# Altium PCB SolarArrayTop.PcbDoc
Units mm, origin at the board's own origin, x right, y up, seen from the top; angles counter-clockwise.
Board outline 94 x 94 mm, 2 copper layers (Top Layer, Bottom Layer), stack 1.567 mm thick; 23 components, 15 nets, 73 pads, 2 vias.
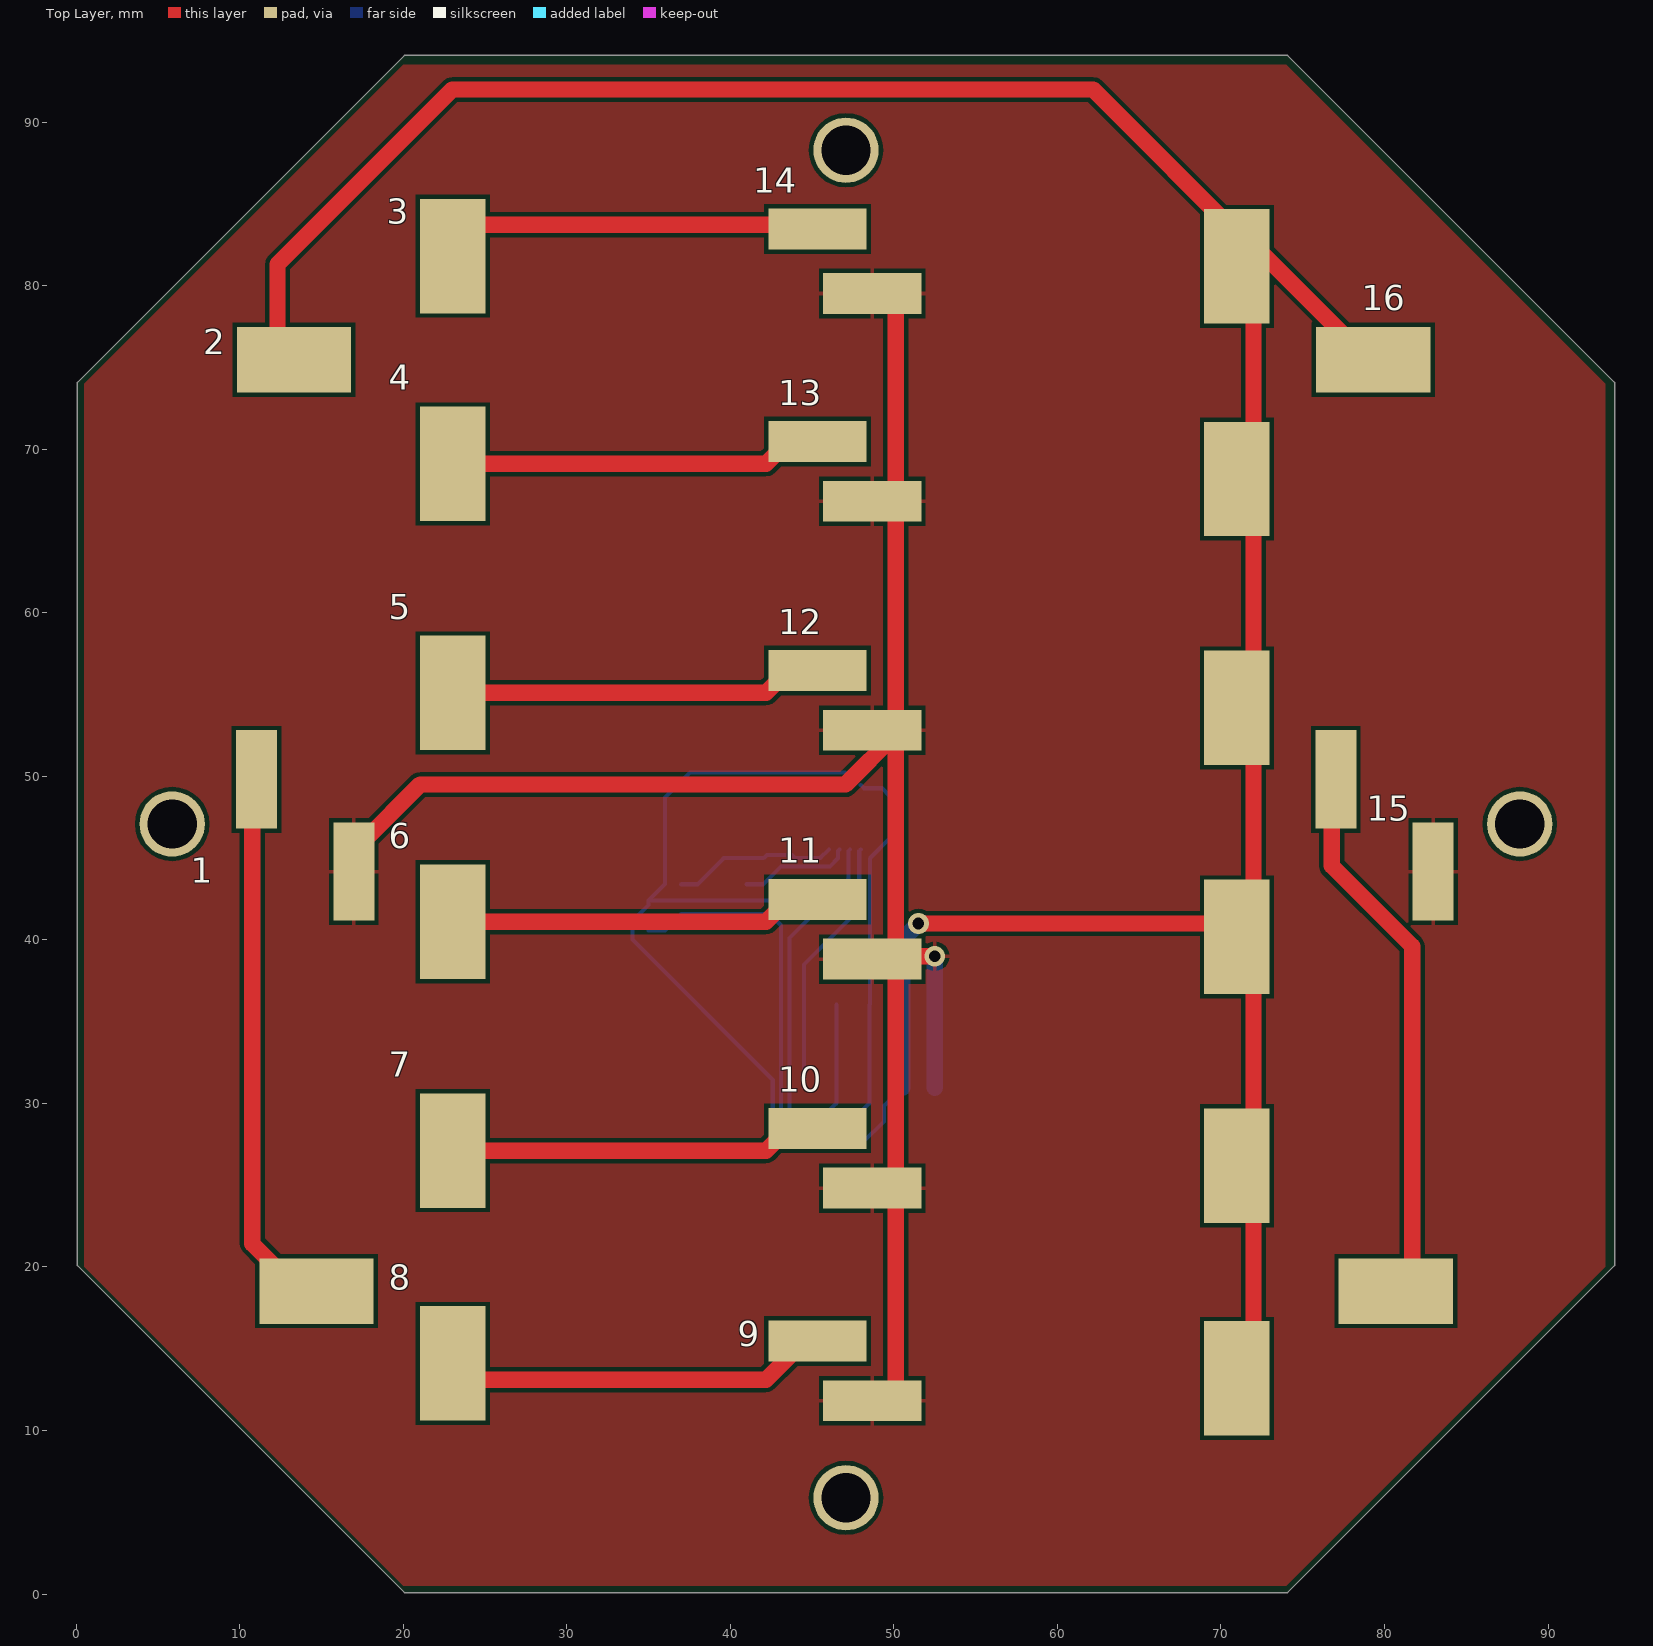
[diagram p0: Top Layer view]
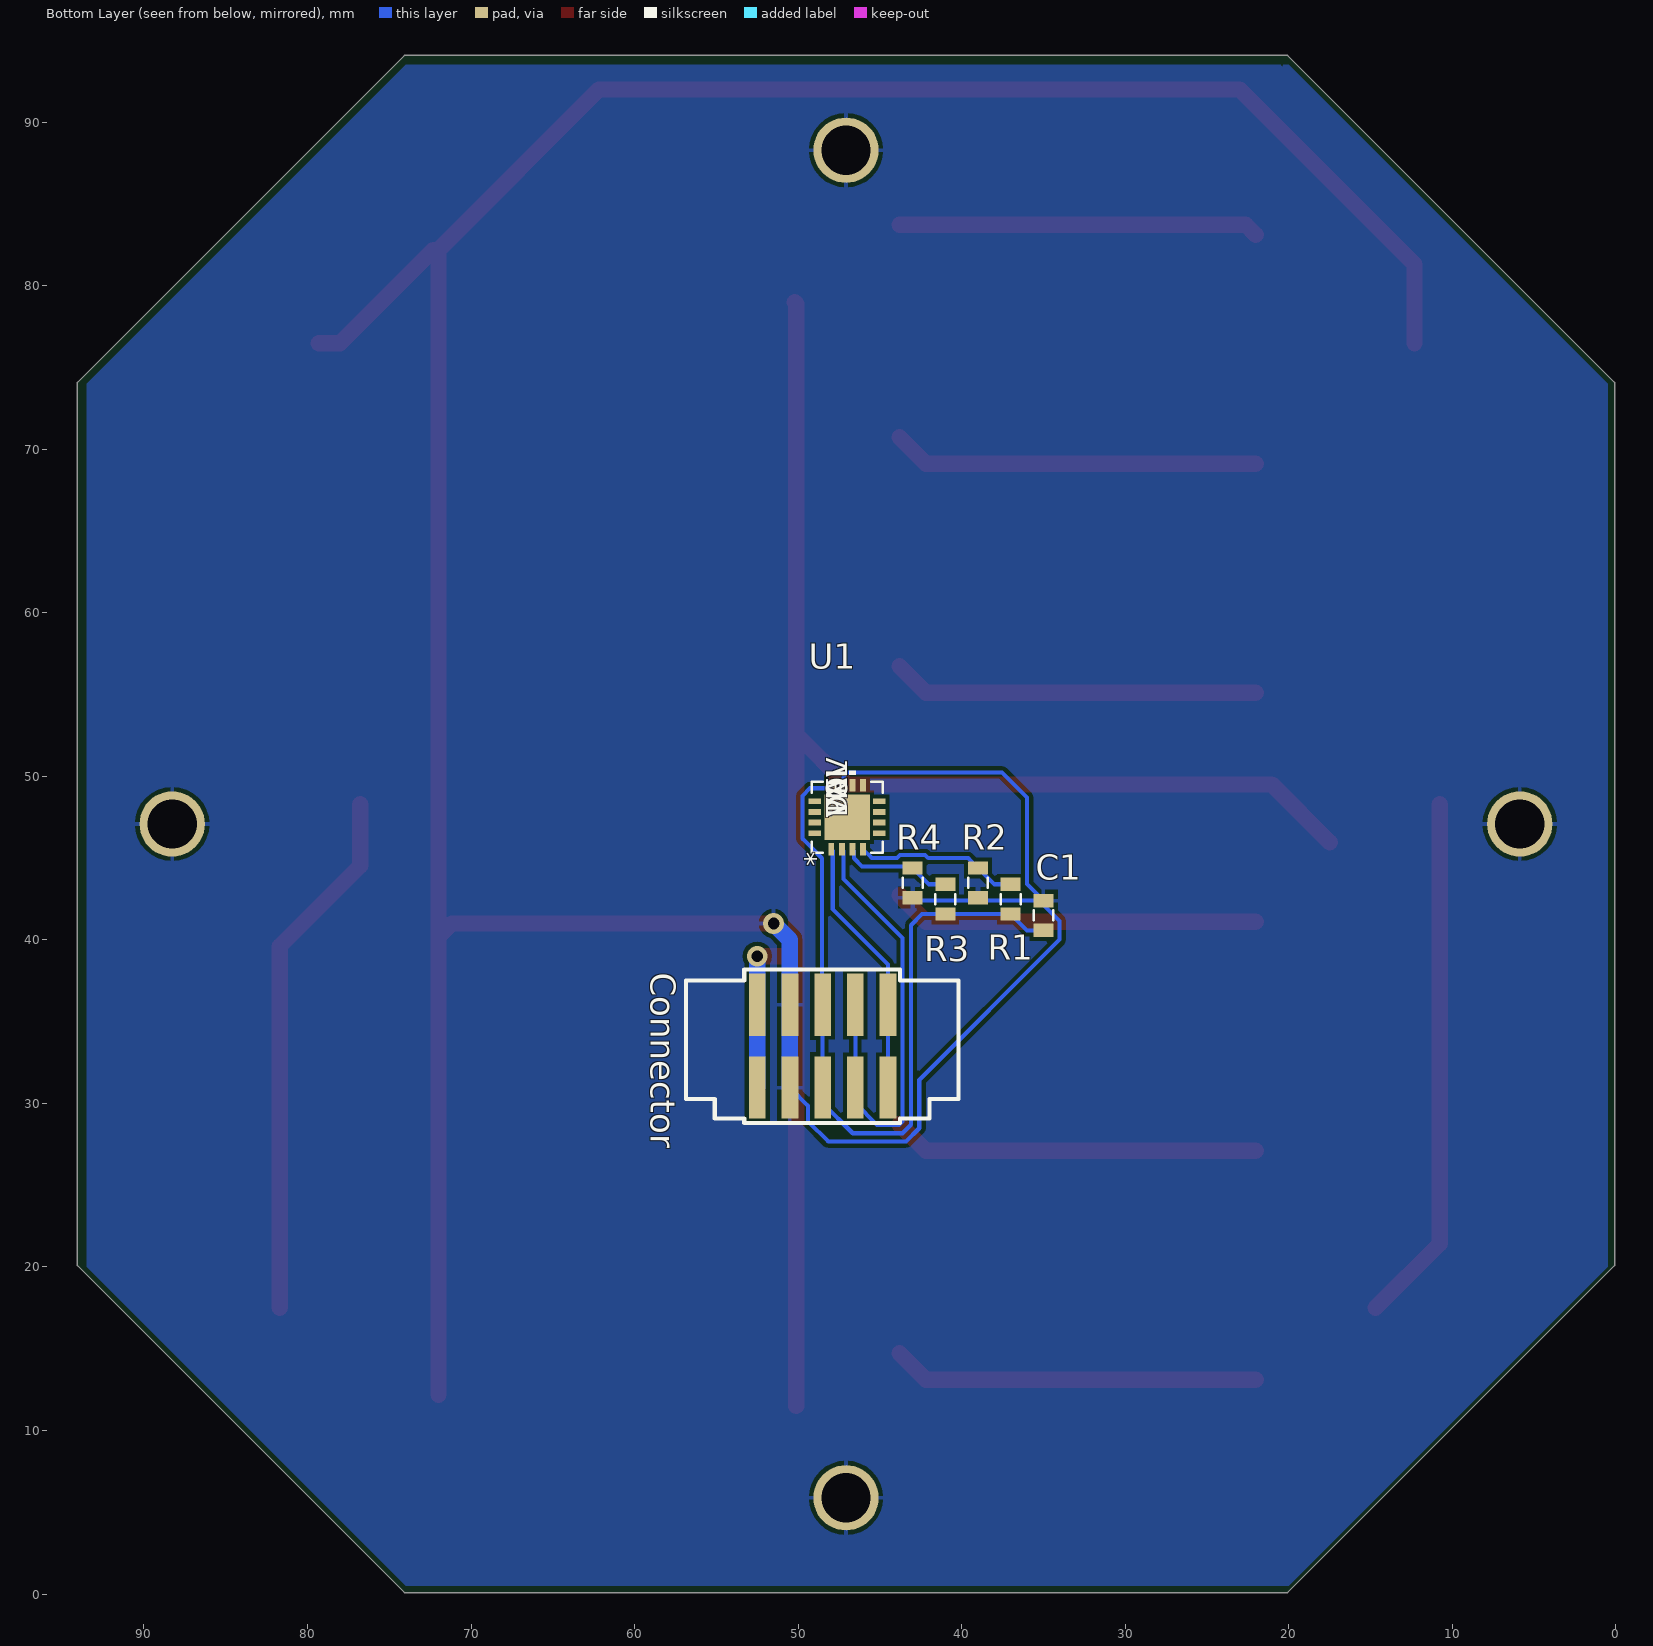
[diagram p1: Bottom Layer view, seen from below]
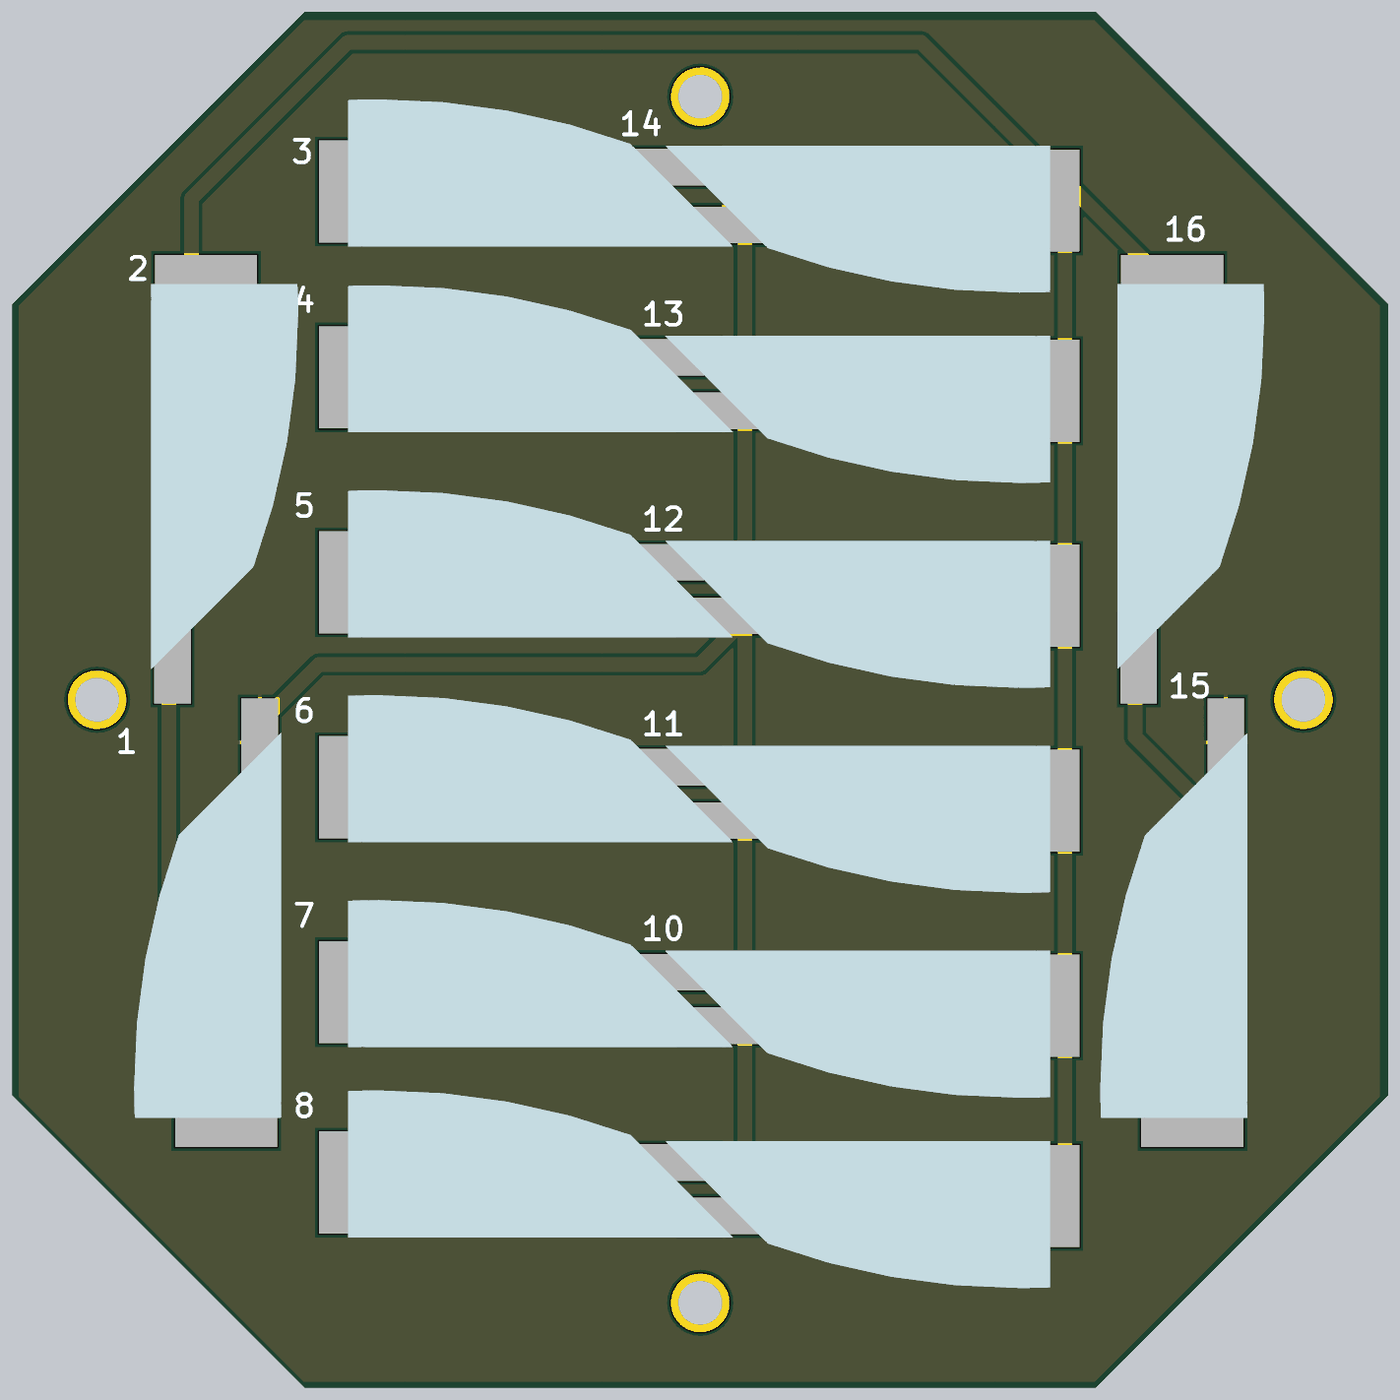
[diagram p2: 3D render of the assembled board from above, using the file's embedded part models]

## Layer stack, top to bottom
Top Solder: solder mask 0.0102, Solder Resist, Dk 3.5
Top Layer: signal copper 0.0356
Dielectric 1: dielectric 1.4961, FR-4, Dk 4.8
Bottom Layer: signal copper 0.0356
Bottom Solder: solder mask 0.0102, Solder Resist, Dk 3.5

## Board outline
20.071,94.088 0.071,74.088 0.071,20.088 20.071,0.088 74.071,0.088 94.071,20.088 94.071,74.088 74.071,94.088

## Design rules (kind name [scope] priority, off if disabled: settings)
Clearance [All] p1: gap=0.254
PolygonConnect [All] p1: connectstyle=Relief reliefconductorwidth=0.254 reliefentries=4 polygonreliefangle="90 Angle" airgapwidth=0.254
RoutingVias [All] p1: holewidth=0.711 width=1.27 viastyle="Through Hole" minholewidth=0.711 minwidth=1.27 maxholewidth=0.711 maxwidth=1.27
SolderMaskExpansion [All] p1: expansion=0.102
Width [All] p1: maxlimit=1 minlimit=0.254 preferedwidth=0.254 minimp=50.000000 maximp=50.000000 favimp=50.000000
29 further rules are at their usual default settings.

## Components (designator, comment, footprint, x,y, rotation, side; value= is the part's Value field where it differs from the comment)
1 "Trisol X Solar Wing" PCBComponent_1 18.5,17 r90 top
2 "Trisol X Solar Wing" PCBComponent_1 9.5,77 r270 top
3 "Trisol X Solar Wing" PCBComponent_1 21.5,78 r0 top
4 "Trisol X Solar Wing" PCBComponent_1 21.5,65.3 r0 top
5 "Trisol X Solar Wing" PCBComponent_1 21.5,51.3 r0 top
6 "Trisol X Solar Wing" PCBComponent_1 21.5,37.3 r0 top
7 "Trisol X Solar Wing" PCBComponent_1 21.5,23.3 r0 top
8 "Trisol X Solar Wing" PCBComponent_1 21.5,10.3 r0 top
9 "Trisol X Solar Wing" PCBComponent_1 72.5,17 r180 top
10 "Trisol X Solar Wing" PCBComponent_1 72.5,30 r180 top
11 "Trisol X Solar Wing" PCBComponent_1 72.5,44 r180 top
12 "Trisol X Solar Wing" PCBComponent_1 72.5,58 r180 top
13 "Trisol X Solar Wing" PCBComponent_1 72.5,72 r180 top
14 "Trisol X Solar Wing" PCBComponent_1 72.5,85 r180 top
15 "Trisol X Solar Wing" PCBComponent_1 84.5,17 r90 top
16 "Trisol X Solar Wing" PCBComponent_1 75.5,77 r270 top
C1 "100pF" 0805 35,41.5 r270 bottom
Connector "T2M-105-01-L-D-SM" T2M-105-01-X-D-SM 48.5,33.5 r180 bottom
R1 "1K" 0805 37,42.5 r270 bottom
R2 "1K" 0805 39,43.5 r270 bottom
R3 "1K" 0805 41,42.5 r270 bottom
R4 "1K" 0805 43,43.5 r270 bottom
U1 "ADT7420UCPZ-R2" CP_16_17 47,47.5 r90 bottom

## Footprints (in the part's own frame and the unit in brackets; to place one, negate y for a bottom-side part, rotate by r counter-clockwise, add the part's x,y. Pads: shape width x height; smd on the part's side, far side on the other; paste and mask are expansions set on the pad)
0805 [mil]
  rect 32x48 smd: 1(-35.43,0) 2(36,0)
  silkscreen extent -12,-24 12,24
CP_16_17 [mil]
  rect 30x14 smd: 1(-77.5,38.39) 2(-77.5,12.8) 3(-77.5,-12.8) 4(-77.5,-38.39) 9(77.5,-38.39) 10(77.5,-12.8) 11(77.5,12.8) 12(77.5,38.39)
  rect 14x30 smd: 5(-38.39,-77.5) 6(-12.8,-77.5) 7(12.8,-77.5) 8(38.39,-77.5) 13(38.39,77.5) 14(12.8,77.5) 15(-12.8,77.5) 16(-38.39,77.5)
  rect 110x110 smd paste-54.5: 17(0,0)
  silkscreen extent -86,-86 112,86, body extent 0,0 10,10, height 10
PCBComponent_1 [mm]
  rect 6x2.5 smd: 0(27.178,1.524)
  rect 4x6.985 smd: 1(1.524,3.81)
  body extent 1.52,0.06 27.82,10.1, height 0.24
T2M-105-01-X-D-SM [mm]
  rect 1.02x3.8 smd mask+0.05: 1(-4,-2.535) 2(-4,2.535) 3(-2,-2.535) 4(-2,2.535) 5(0,-2.535) 6(0,2.535) 7(2,-2.535) 8(2,2.535) 9(4,-2.535) 10(4,2.535)
  silkscreen extent -8.36,-4.69 8.31,4.69, body extent -7.84,-4.31 7.84,4.31, height 6.5

## Part data
C1: library part CAP0805_1nF
Connector: library part T2M-105-01-X-D-SM
R1 R2 R3 R4: library part RESISTOR0805-RES_1K
U1: "Imported"

## Free pads (board coordinates)
  round 4 hole 3: 1(5.871,47.088) 1(47.071,5.888) 1(47.071,88.288) 1(88.271,47.088)

## Via types
v1: diameter 1.27, hole 0.711, Top Layer to Bottom Layer, 2 vias

## Nets (pads, with @x,y where several pads share a name; then routed paths per layer and width w, separated by ;. In a path a pad name is that pad's centre, name@x,y a point inside that pad or via, vN(x,y) a via of type N, cw(c..) or ccw(c..) an arc to the next point about the centre after c; other vN are vias at no path point)
Net1_0: 1.0 3.0 4.0 5.0 6.0 7.0 8.0 15.0 Connector.1 Connector.2 | length 113.9
  Top Layer w0.254: 1.0@17.23,45.702 1.0@17.5,45.972
  Top Layer w1: 1.0@17.5,45.972 21.028,49.5 47.039,49.5 5.0@50.109,52.57 ; 8.0@50.109,11.5 6.0@50.109,38.57 ; 3.0@50.202,79 50.109,78.907 5.0@50.109,52.57 ; v1(52.5,39) 50.539,39 6.0@50.109,38.57 ; 6.0@50.109,38.57 5.0@50.109,52.57
  Bottom Layer w1: Connector.1 Connector.2 v1(52.5,39)
Net1_1: 1.1 2.0 | length 32.4
  Top Layer w1: 2.0@10.77,48.298 10.77,21.428 1.1@14.69,17.508
Net2_1: 2.1 9.1 10.1 11.1 12.1 13.1 14.1 16.1 C1.1 Connector.3 Connector.4 pad.1 R2.2 R4.2 U1.11 | length 239.3
  Top Layer w1: 2.1@12.31,76.492 12.31,81.31 23,92 62.182,92 14.1@71.992,82.19 ; v1(51.5,41) 71.182,41 11.1@71.992,40.19 ; 9.1@71.992,12.19 71.992,26.19 11.1@71.992,40.19 ; 16.1@79.31,76.492 78.008,76.492 72.31,82.19 14.1@71.992,82.19 ; 11.1@71.992,40.19 71.992,54.19 71.992,68.19 14.1@71.992,82.19
  Bottom Layer w0.254: R4.2 42.814,42.4 C1.1 ; U1.11 47.234,49.56 47.234,50.007 47.011,50.23 37.53,50.23 36.009,48.709 36.009,43.409 C1.1 ; Connector.3 49.391,29.856 49.391,28.907 48.152,27.668 43.411,27.668 42.593,28.486 42.593,31.438 34.009,40.021 34.009,41.15 35,42.14 C1.1
  Bottom Layer w1: Connector.3 Connector.4 50.5,40 v1(51.5,41)
Net3_1: 3.1 14.0 | length 22
  Top Layer w1: 3.1@22.008,83.11 22.628,83.73 14.0@43.798,83.73
Net4_1: 4.1 13.0 | length 22.5
  Top Layer w1: 4.1@22.008,69.11 42.178,69.11 13.0@43.798,70.73
Net5_1: 5.1 12.0 | length 22.5
  Top Layer w1: 5.1@22.008,55.11 42.178,55.11 12.0@43.798,56.73
Net6_1: 6.1 11.0 | length 22.5
  Top Layer w1: 6.1@22.008,41.11 42.178,41.11 11.0@43.798,42.73
Net7_1: 7.1 10.0 | length 22.5
  Top Layer w1: 7.1@22.008,27.11 42.178,27.11 10.0@43.798,28.73
Net8_1: 8.1 9.0 | length 22.5
  Top Layer w1: 8.1@22.008,13.11 42.178,13.11 9.0@43.798,14.73
Net15_1: 15.1 16.0 | length 32.8
  Top Layer w1: 16.0@76.77,48.298 76.77,44.53 81.69,39.61 15.1@81.69,17.508
NetC1_2: C1.2 Connector.5 Connector.6 R1.2 R3.2 U1.12 | length 48.7
  Bottom Layer w0.254: C1.2 36,40.586 R1.2 R3.2 42.414,41.586 43.101,40.899 43.101,28.697 43.622,28.176 46.66,28.176 48.5,30.016 Connector.5 Connector.6 48.534,36.069 48.534,44.993 49.73,46.189 49.73,48.811 49.263,49.278 48.165,49.278 U1.12
NetConnector_7: Connector.7 Connector.8 U1.2 | length 27.7
  Bottom Layer w0.254: Connector.8 Connector.7 46.5,30.016 45.168,28.684 43.832,28.684 43.609,28.907 43.609,40.109 47.234,43.734 47.234,45.44 U1.2
NetConnector_9: Connector.9 Connector.10 U1.1 | length 16
  Bottom Layer w0.254: Connector.9 Connector.10 44.5,38.5 47.884,41.884 47.884,45.44 U1.1
NetR1_1: R1.1 R2.1 U1.4 | length 10.1
  Bottom Layer w0.254: R1.1 38,43.4 R2.1 39.6,45 42.045,45 42.233,45.187 43.767,45.187 43.955,45 45.494,45 U1.4
NetR3_1: R3.1 R4.1 U1.3 | length 6.8
  Bottom Layer w0.254: R3.1 42,43.4 R4.1 43.092,44.492 46.083,44.492 46.584,44.993 46.584,45.44 U1.3
pads on no net: U1.5 U1.6 U1.7 U1.8 U1.9 U1.10 U1.13 U1.14 U1.15 U1.16 U1.17

## Polygon pours and split planes (outlines as drawn)
Net2_1 on Bottom Layer "Array_neg" (solid, pour order 2): 1,74 20.5,93.5 74,93.5 93.5,74 93.5,20 74,0.5 20,0.5 0.5,20 0.5,74 20,93.5 20.5,93.5
Net1_0 on Top Layer "Array_pos" (solid, pour order 4): 0.5,74 20,93.5 74,93.5 93.5,74 93.5,20 74,0.5 20,0.5 0.5,20 0.5,74

## Text inside footprints (layer, text, board x,y; h text height)
Connector: Mechanical 1 "J1" at 48.997,32.992 h0.76
U1: Bottom Overlay "TOL" at 47,47.5 h1.27 r270; Bottom Overlay "VAL" at 47,47.5 h1.27 r270; Bottom Overlay "DEV" at 47,47.5 h1.27 r270; Bottom Overlay "PN" at 47,47.5 h1.27 r270; Bottom Overlay "*" at 48.3,44.515 h1.27 r270; Mechanical 13 "RefDes2" at 47,47.5 h1.27 r270; Mechanical 13 "*" at 48.3,45.912 h1.27 r270